# EAGLE board Stick Power Supply (EAGLE 5.11)
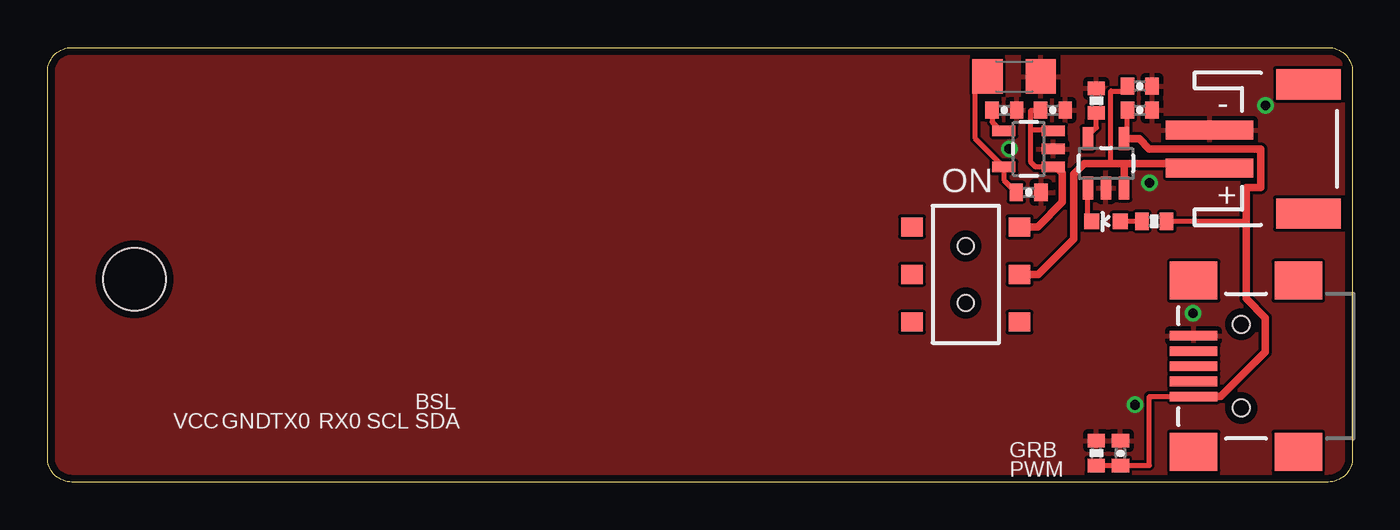
[diagram p0: board, top side]
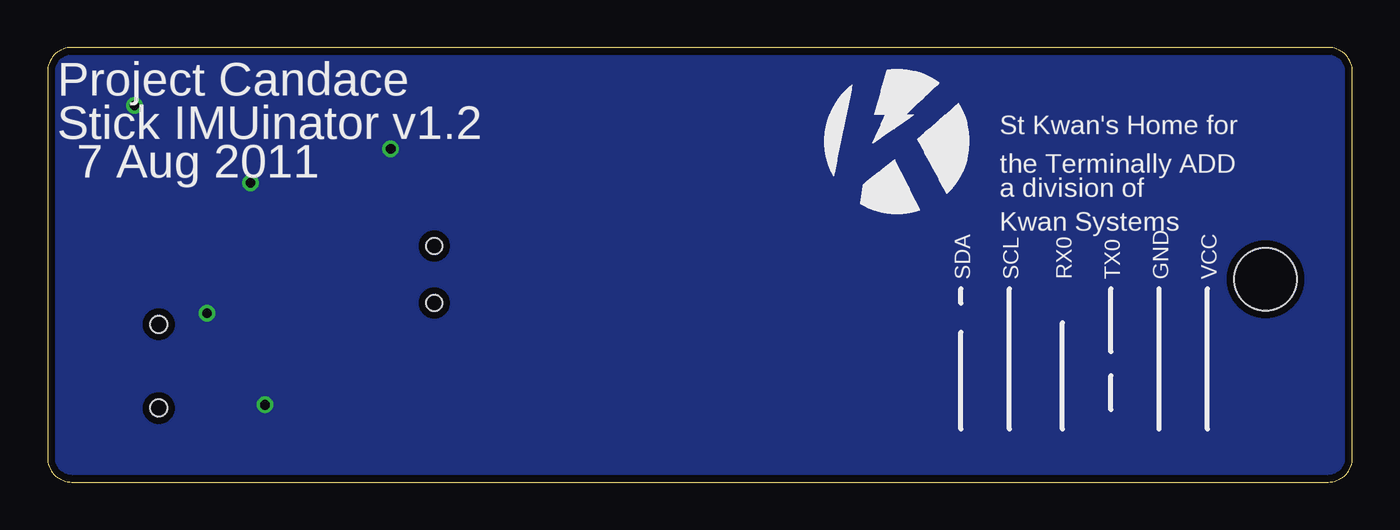
[diagram p1: board, bottom side, seen from below]

Size 68.58 x 22.86 mm. Coordinates in mm from the lower left corner, seen from the top.
Outline: 1.27,22.86 67.31,22.86 arc-90 68.58,21.59 68.58,1.27 arc-90 67.31,0 1.27,0 arc-90 0,1.27 0,21.59 arc-90 1.27,22.86
Copper layers (1*16): Top 0.0356mm / dielectric 1.5011mm / Bottom 0.0356mm
Design rules "LaenPCBOrder *": minimum track width 6mil, minimum drill 13mil, track to track 6mil, track to pad 6mil, pad to pad 6mil, via to via 6mil, smd to smd 6mil, copper to edge 15mil, drill to drill 6mil, minimum pad ring 7mil, minimum via ring 7mil, stop-mask expansion 4mil, vias tented up to drill 0mil, thermal gap 10mil
Net classes: 0 default: width 0.152 mm, drill 0.33 mm, clearance 0.152 mm; 1 power: width 0.152 mm, drill 0.33 mm, clearance 0.152 mm to class 0, clearance 0.152 mm; 2 hv: width 0.152 mm, drill 0.33 mm, clearance 0.152 mm to class 0, clearance 0.152 mm to class 1, clearance 0.152 mm

## Footprints (pad centres in the part's own frame; a part is rotated, then mirrored left to right if it is on the bottom)
0402-CAP = smd 0.7 x 0.9: 1 -0.65,0; 2 0.65,0
1206 = smd 1.6 x 1.8: 1 -1.4,0; 2 1.4,0
LED-0603 = smd 0.8 x 0.8: A 0,-0.75; C 0,0.75
USB-MINIB = smd 2.5 x 0.5: D+ 2.5,0; D- 2.5,0.8; GND 2.5,-1.6; ID 2.5,-0.8; VBUS 2.5,1.6 | smd 2.5 x 2: MTN1 -3,4.5; MTN2 2.5,4.5; MTN3 -3,-4.5; MTN4 2.5,-4.5 | hole 0.9: 0,2.2; 0,-2.2
JST-2-SMD = smd 1 x 4.6: 1 -1,-3.7; 2 1,-3.7 | smd 1.6 x 3.4: NC1 -3.4,1.5; NC2 3.4,1.5
STAND-OFF = hole 3.302: 0,0
0402-RES = smd 0.7 x 0.9: 1 -0.65,0; 2 0.65,0
AYZ0202 = smd 1 x 1.15: 1 -2.5,2.825; 2 0,2.825; 3 2.5,2.825; 4 -2.5,-2.825; 5 0,-2.825; 6 2.5,-2.825 | hole 0.85: 1.5,0; -1.5,0
SOT23-5 = smd 0.55 x 1.2: 1 -0.95,-1.3; 2 0,-1.3; 3 0.95,-1.3; 4 0.95,1.3; 5 -0.95,1.3

## Placement (x,y rotation side)
C002  100nF  [0402-CAP]  56.39,1.52 90 top
C201  2.2uF  [1206]  50.8,21.34 0 top
C202  100nF  [0402-CAP]  51.56,15.24 0 top
C203  100nF  [0402-CAP]  50.29,19.56 0 top
C204  1uF  [0402-CAP]  52.83,19.56 0 top
C301  4.7uF  [0402-CAP]  57.4,20.83 0 top
C302  4.7uF  [0402-CAP]  57.4,19.56 0 top
D301  RED  [LED-0603]  55.63,13.72 90 top
J001  USBSMD  [USB-MINIB]  62.74,6.1 180 top
J301  JST 2mm  [JST-2-SMD]  64.77,17.53 270 top
JP1  STAND-OFF  [STAND-OFF]  4.57,10.67 0 top
R014  100k  [0402-RES]  55.12,1.52 270 top
R301  2.2k  [0402-RES]  55.12,20.07 270 top
R302  330  [0402-RES]  58.17,13.72 0 top
S201  SPST  [AYZ0202]  48.26,10.92 270 top
U201  MIC5319-3.3  [SOT23-5]  51.56,17.53 90 top
U301  73831  [SOT23-5]  55.63,16.76 0 top

## Library data of the parts
C002 C201-C204 C301 C302 D301 J001 J301 JP1 R014 R301 R302 S201 U201 U301 = SparkFun

## Nets
GND [power]: C002.2 C201.2 C202.2 C203.2 C204.2 C301.2 C302.2 J001.GND J301.1 R014.1 R301.1 U201.2 U301.2
N$2: R301.2 U301.5
N$4: D301.C U301.1
N$5: D301.A R302.1
N$17: C203.1 U201.4
RAW: C204.1 S201.1 U201.1 U201.3
USB_VIN: C002.1 C302.1 J001.VBUS R014.2 R302.2 U301.4
VCC [power]: C201.1 C202.1 U201.5
VLIPO: C301.1 J301.2 S201.2 U301.3

## Tracks (layer width: path | path; a pad name or v marks a point on that pad's centre or on a via)
GND  (via drill 0.51)
  other vias: 64.01,19.81 60.2,8.89 57.15,4.06 50.55,17.53 57.91,15.75
  pour Top: 1.27,22.86 67.31,22.86 arc-90 68.58,21.59 68.58,1.27 arc-90 67.31,0 1.27,0 arc-90 0,1.27 0,21.59 arc-90
  pour Bottom: 1.27,22.86 67.31,22.86 arc-90 68.58,21.59 68.58,1.27 arc-90 67.31,0 1.27,0 arc-90 0,1.27 0,21.59 arc-90
N$2
  Top 0.254: U301.5 54.61,18.13 55.12,18.64 R301.2
N$4
  Top 0.254: U301.1 54.68,13.72 D301.C
N$5
  Top 0.254: R302.1 D301.A
N$17
  Top 0.254: C203.1 49.64,18.94 50.04,18.54 50.2,18.54 U201.4
RAW
  Top 0.254: 51.67,18.54 51.67,16.83 51.93,16.58 U201.1 | 51.67,18.54 51.67,19.56 C204.1 | U201.3 52.8,18.54 51.67,18.54
  Top 0.406: S201.1 52.03,13.42 53.34,14.73 53.34,16.26 53.02,16.58 U201.1
USB_VIN
  Top 0.254: 55.12,0.9 R014.2 C002.1 57.91,0.87 57.91,4.5 J001.VBUS | U301.4 56.5,18.14 56.75,18.14 C302.1 | 62.99,13.72 R302.2
  Top 0.406: J001.VBUS 61.65,4.5 64.01,6.86 64.01,8.64 62.99,9.65 62.99,13.72 62.99,15.49 63.75,15.49 63.75,17.53 57.91,17.53 57.37,18.06 U301.4
VCC
  Top 0.254: C202.1 50.26,15.89 U201.5 48.77,18.07 48.77,20.57 49.02,20.83 49.02,20.96 arc-90 C201.1
VLIPO
  Top 0.254: 55.88,16.76 55.88,20.57 56.75,20.57 C301.1 | 60.83,16.76 arc-90 J301.2 | 56.64,16.76 arc90 56.58,16.7
  Top 0.406: 60.83,16.76 56.64,16.76 55.88,16.76 54.48,16.76 53.92,16.2 53.92,12.78 52.07,10.92 S201.2 | 56.58,16.7 U301.3

## Text on the board
tPlace: - | ON | + | BSL | VCC | GND | TX0 | RX0 | SCL | SDA | GRB | PWM
bPlace: Project Candace | St Kwan's Home for | Stick IMUinator v1.2 | the Terminally ADD | 7 Aug 2011 | a division of | Kwan Systems | VCC | GND | TX0 | RX0 | SCL | SDA
tValues: Horizontal JST
tDocu: BYP 4 | 3 EN | VOUT 5 | 1 VIN | 2 GND | 5 PROG | 4 VDD | STAT 1 | VBAT 3 | VSS 2 | GND | NC | 7 SDA | 6 SCL | 5 NC | D+ | D- | 8 XCLR | 4 VDD | VBus | 1 GND | 2 EOC | 3 VDDA